# Altium PCB PCB1.PcbDoc
Units mm, origin at the board's own origin, x right, y up, seen from the top; angles counter-clockwise.
Board outline 100 x 54 mm, 2 copper layers (Top Layer, Bottom Layer); 27 components, 13 nets, 80 pads, 0 vias.
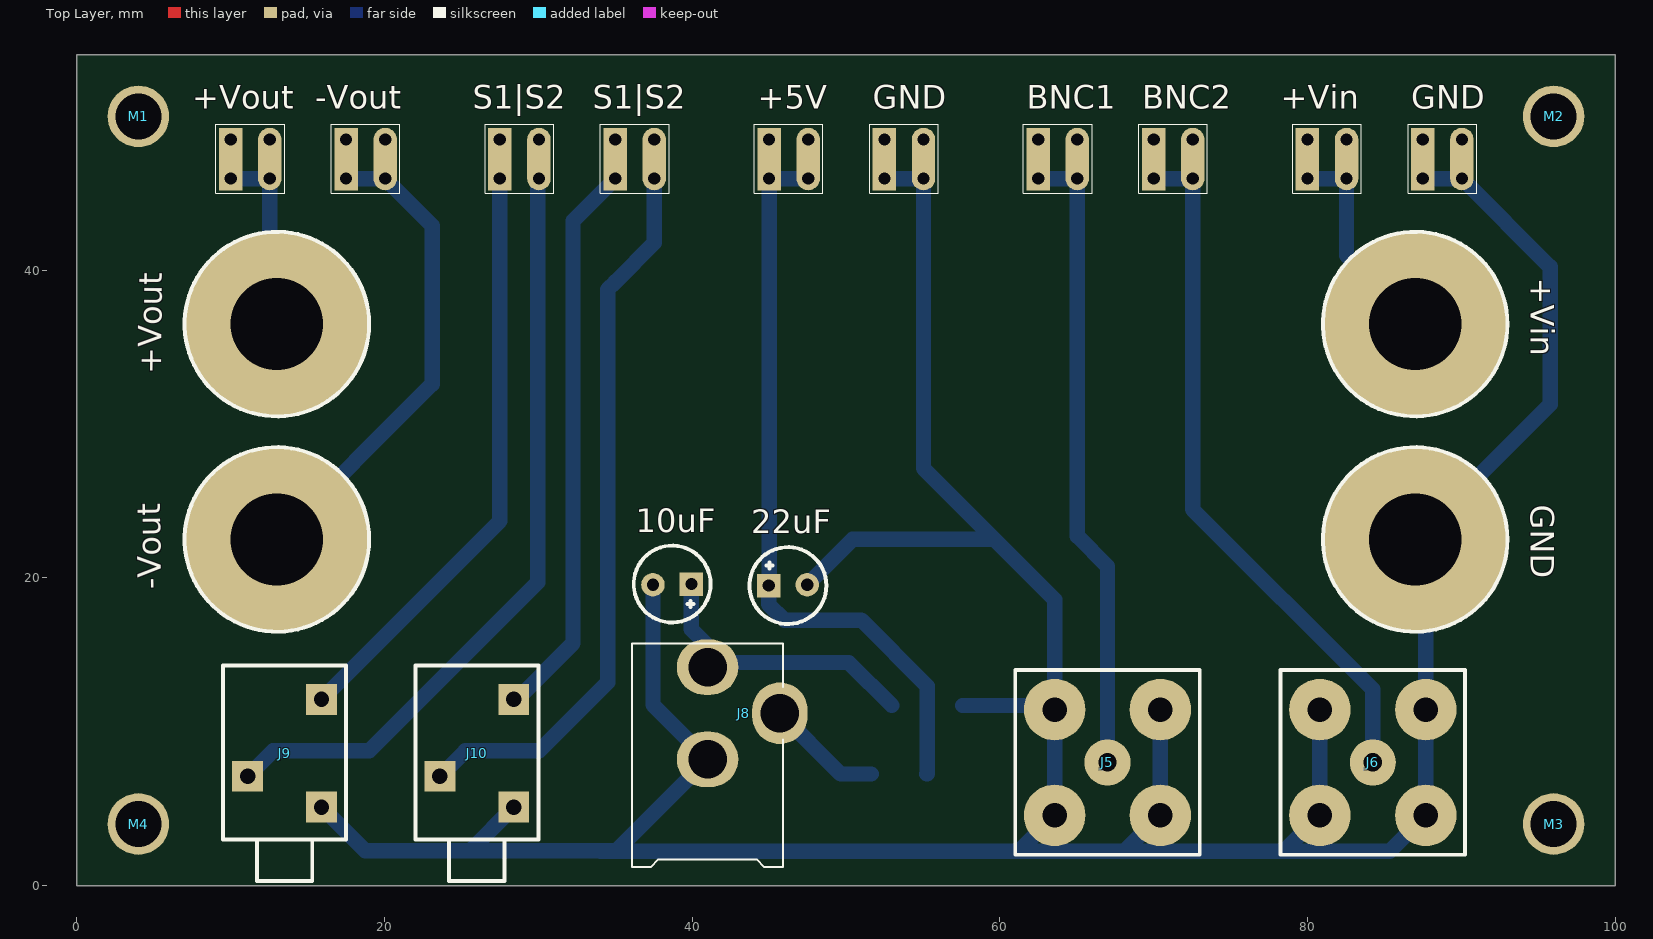
[diagram p0: Top Layer view]
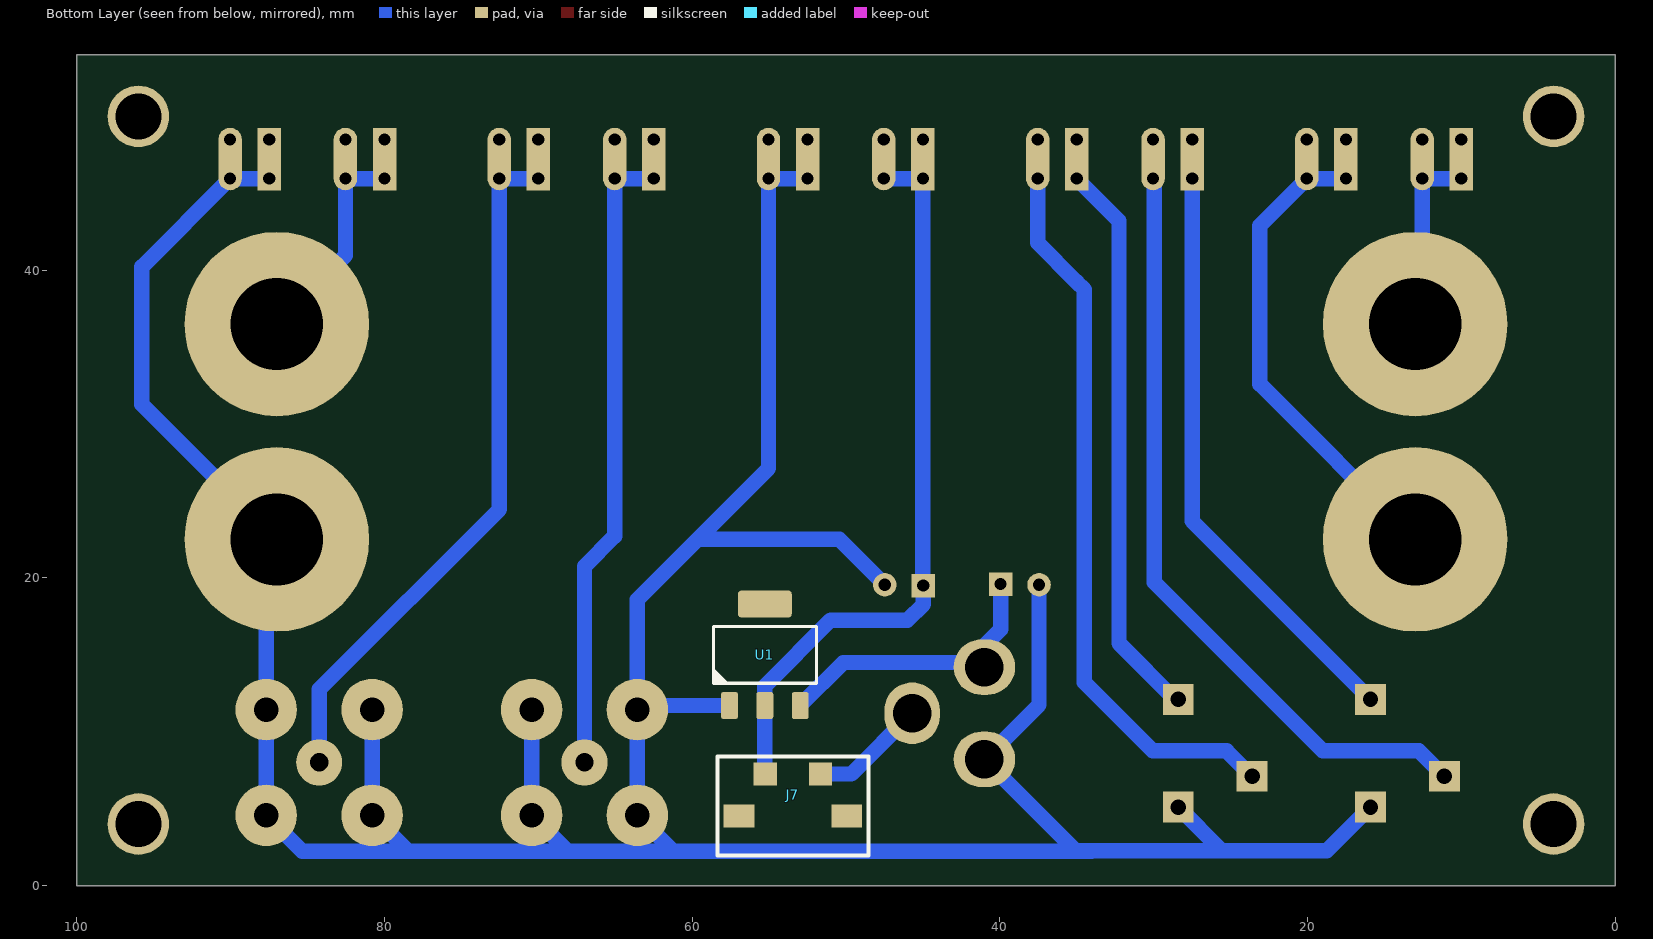
[diagram p1: Bottom Layer view, seen from below]

## Layer stack, top to bottom
Top Solder: solder mask 0.0102, Solder Resist, Dk 3.5
Top Layer: signal copper 0.0356
Dielectric 1: dielectric 0.32, FR-4, Dk 4.8
Bottom Layer: signal copper 0.0356
Bottom Solder: solder mask 0.0102, Solder Resist, Dk 3.5

## Board outline
0,0 100,0 100,54 0,54

## Design rules (kind name [scope] priority, off if disabled: settings)
Clearance [All] p1: gap=0.8
PolygonConnect [All] p1: connectstyle=Relief reliefconductorwidth=0.254 reliefentries=4 polygonreliefangle="90 Angle" airgapwidth=0.254
RoutingVias [All] p1: holewidth=0.711 width=1.27 viastyle="Through Hole" minholewidth=0.711 minwidth=1.27 maxholewidth=0.711 maxwidth=1.27
SolderMaskExpansion [All] p1: expansion=0.102
Width [All] p1: maxlimit=3 minlimit=0.35 preferedwidth=1
30 further rules are at their usual default settings.

## Classes and differential pairs
component class Sheet1: 10uF 22uF +5V +Vin +Vout -Vout BNC1 BNC2 GND J5 J6 J7 J8 J9 J10 M1 M2 M3 M4 S1 U1

## Components (designator, comment, footprint, x,y, rotation, side; value= is the part's Value field where it differs from the comment)
10uF "10uF" Capacitor_E 38.7,19.6 r180 top (schematic designator C1)
22uF "22uF" Capacitor_E 46.225,19.5 r0 top (schematic designator C2)
+5V "Header" HDR1X2 45,48.5 r0 top (schematic designator H6)
+Vin "Header" HDR1X2 80,48.5 r0 top (schematic designator H10)
+Vin "BANANA" Banana 87,36.5 r0 top (schematic designator J2)
+Vout "Header" HDR1X2 10,48.5 r0 top (schematic designator H1)
+Vout "BANANA" Banana 13,36.5 r0 top (schematic designator J1)
-Vout "Header" HDR1X2 17.5,48.5 r0 top (schematic designator H2)
-Vout "BANANA" Banana 13,22.5 r0 top (schematic designator J3)
BNC1 "Header" HDR1X2 62.5,48.5 r0 top (schematic designator H7)
BNC2 "Header" HDR1X2 70,48.5 r0 top (schematic designator H8)
GND "Header" HDR1X2 52.5,48.5 r0 top (schematic designator H5)
GND "Header" HDR1X2 87.5,48.5 r0 top (schematic designator H9)
GND "BANANA" Banana 87,22.5 r0 top (schematic designator J4)
J5 "BNC Fem. 50R" CONN_BNC 67,8 r0 top
J6 "BNC Fem. 50R" CONN_BNC 84.25,8 r0 top
J7 "USB Micro Type B (recommended if hand soldering)" USB_MICRO-B_v2 54.75,7.5 r180 bottom
J8 "CONN_PWR_JACK_2.1x5.5mm" CONN_PWR_JACK_2.1x5.5mm 41,0.5 r180 top
J9 "Audio Jack" CONN_AUDIO 13.5,3 r90 top
J10 "Audio Jack" CONN_AUDIO 26,3 r90 top
M1 "Suport" Support 4,50 r0 top
M2 "Suport" Support 96,50 r0 top
M3 "Suport" Support 96,4 r0 top
M4 "Suport" Support 4,4 r0 top
S1|S2 "Header" HDR1X2 27.5,48.5 r0 top (schematic designator H3)
S1|S2 "Header" HDR1X2 35,48.5 r0 top (schematic designator H4)
U1 "AMS1117" SOT223 55.275,15 r90 bottom

## Footprints (in the part's own frame and the unit in brackets; to place one, negate y for a bottom-side part, rotate by r counter-clockwise, add the part's x,y. Pads: shape width x height; smd on the part's side, far side on the other; paste and mask are expansions set on the pad)
Banana [mm] "Female"
  round 12 hole 6: 1(0,0)
  silkscreen extent -6,-6 6,6
Capacitor_E [mm]
  rect 1.524x1.524 hole 0.8: 1(-1.25,0)
  round 1.524 hole 0.8: 2(1.25,0.05)
  silkscreen extent -2.5,-2.5 2.5,2.5, body extent -2.49,-2.45 2.49,2.55, height 1.5
CONN_AUDIO [mm]
  rect 2x2 hole 1: 1(2.1,-2.4) 2(4.1,2.4) 3(9.1,-2.4)
  silkscreen extent -2.7,-4 11.3,4
CONN_BNC [mm]
  round 3 hole 1.2: 1(0,0)
  round 4 hole 1.6: 2(-3.44,-3.44) 2(-3.44,3.44) 2(3.44,-3.44) 2(3.44,3.44)
  silkscreen extent -6,-6 6,6
CONN_PWR_JACK_2.1x5.5mm [mm] "Power Connector, 2.1mm ID, 5.5mm OD"
  oval 4x3.6 hole 2.5: 1(0,-13.7) 2(0,-7.7)
  oval 3.6x4 hole 2.5: 3(-4.7,-10.7)
  silkscreen extent -4.9,-15.22 4.92,-0.7, body extent -4.9,-14.1 4.5,0, height 11
HDR1X2 [mil] "Connector; Header; 2 Position"
  rect 60x160 hole 31.5 copper offset 0,50: 1(0,-100)
  rect 60x160 hole 31.5 copper offset 0,-50: 1(0,0)
  oval 60x160 hole 31.5 copper offset 0,50: 2(100,-100)
  oval 60x160 hole 31.5 copper offset 0,-50: 2(100,0)
  silkscreen extent -38,-138 138,39
SOT223 [mm] "SOT223 /SC-73"
  round 1 on Mech15: 0(0,0)
  rrect25% 1.75x1.1 smd: 1(-3.3,2.3) 2(-3.3,0) 3(-3.3,-2.3)
  rrect25% 1.75x3.5 smd: 4(3.3,0)
  silkscreen extent -1.85,-3.35 1.85,3.35, body extent -3.65,-3.35 3.65,3.35, height 1.8
Support [mm]
  round 4 hole 3: 0(0,0)
USB_MICRO-B_v2 [mm]
  rect 1.5x1.5 smd: 1(-0.5,-0.25) 5(3.1,-0.25)
  rect 2x1.5 smd: SH(-2.2,-2.975) SH(4.8,-2.975)
  silkscreen extent -3.6,-5.54 6.2,0.9

## Part data
10uF 22uF: library part CAPE
+5V +Vin +Vout -Vout BNC1 BNC2 GND GND S1|S2 S1|S2: library part Header2P, "Header, 2-pin"
+Vin +Vout -Vout GND: "Female Connector"
J5 J6: library part CONN_BNC_FEM_50R, "Connector BNC 50 Ohm right-angle PCB mounted"
J7: library part USB_Micro_TypeB_FCI, "Connector SMD-THD USB Micro Type B middle mount"
J9 J10: library part CONN_MINIPHONEJACK, "Stereo phone jack mini"
U1: "Voltage Regulator"

## Nets (pads, with @x,y where several pads share a name; then routed paths per layer and width w, separated by ;. In a path a pad name is that pad's centre, name@x,y a point inside that pad or via, vN(x,y) a via of type N, cw(c..) or ccw(c..) an arc to the next point about the centre after c; other vN are vias at no path point)
+5V: 22uF.1 +5V.1 +5V.2 J7.1 U1.2 | length 48.5
  Bottom Layer w1: +5V.2@47.54,45.96 45,45.96 45,19.525 22uF.1 44.975,18.275 46,17.25 51,17.25 55.275,12.975 U1.2 55.275,7.275 J7.1
+VIN: +Vin.1 +Vin.2 | length 13.8
  Bottom Layer w1: +Vin.1@80,45.96 82.54,45.96 82.54,40.96 +Vin.1@87,36.5
BNC_1: BNC1.1 BNC1.2 J5.1 | length 41.3
  Bottom Layer w1: BNC1.1@62.5,45.96 65.04,45.96 65.04,22.71 67,20.75 J5.1
BNC_2: BNC2.1 BNC2.2 J6.1 | length 45.4
  Bottom Layer w1: BNC2.1@70,45.96 72.54,45.96 72.54,24.46 84.25,12.75 J6.1
GND: 10uF.2 22uF.2 GND.1 GND.2 J5.2 J6.2 J8.2 J9.1 J10.1 U1.1 | length 240.4
  Bottom Layer w1: J9.1 18.75,2.25 25.55,2.25 ; J10.1 25.55,2.25 ; 34.03,2.23 61.25,2.23 ; 10uF.2 37.45,11.75 J8.2 ; J8.2@40.5,7.7 35.05,2.25 25.55,2.25 ; 22uF.2 50.425,22.5 59.655,22.5 ; GND.1@52.5,45.96 55.04,45.96 55.04,27.115 59.655,22.5 ; U1.1 63.3,11.7 J5.2@63.56,11.44 ; J5.2@70.44,11.44 70.44,4.56 68.11,2.23 ; J6.2@80.81,11.44 80.81,4.56 78.48,2.23 ; GND.1@87.5,45.96 90.04,45.96 95.775,40.225 95.775,31.275 87,22.5 87.69,21.81 87.69,11.44 87.69,4.56 85.36,2.23 78.48,2.23 ; 59.655,22.5 63.56,18.595 J5.2@63.56,11.44 ; 61.25,2.23 63.56,4.54 63.56,4.56 J5.2@63.56,11.44 ; 61.25,2.23 68.11,2.23 ; 68.11,2.23 78.48,2.23
NetJ7_5: J7.5 J8.3 | length 7.6
  Bottom Layer w1: J8.3 49.65,7.25 J7.5
POWERDC: 10uF.1 J8.1 U1.3 | length 19
  Bottom Layer w1: 10uF.1 39.95,16.65 J8.1@42.175,14.425 ; J8.1@39.968,14.232 J8.1@40,14.2 ; J8.1@41.3,14.5 50.175,14.5 U1.3
S11: J9.3 S1|S2.1@27.5,45.96 S1|S2.1@27.5,48.5 | length 38.7
  Bottom Layer w1: J9.3 27.5,23.7 S1|S2.1@27.5,45.96
S12: J9.2 S1|S2.2@30.04,45.96 S1|S2.2@30.04,48.5 | length 50.4
  Bottom Layer w1: J9.2 12.75,8.75 19,8.75 29.95,19.7 29.95,45.87 S1|S2.2@30.04,45.96
S21: J10.3 S1|S2.1@35,45.96 S1|S2.1@35,48.5 | length 36.7
  Bottom Layer w1: J10.3@28.5,12 32.25,15.75 32.25,43.21 S1|S2.1@35,45.96
S22: J10.2 S1|S2.2@37.54,45.96 S1|S2.2@37.54,48.5 | length 47.4
  Bottom Layer w1: J10.2 25.25,8.75 30.053,8.75 34.5,13.197 34.5,38.75 35,39.25 37.54,41.79 S1|S2.2@37.54,45.96
VOUT+: +Vout.1 +Vout.2 | length 12.2
  Bottom Layer w1: +Vout.1@10,45.96 12.54,45.96 12.54,36.96 +Vout.1@13,36.5
VOUT-: -Vout.1 -Vout.2 | length 31.5
  Bottom Layer w1: -Vout.1@13,22.5 23.1,32.6 23.1,42.9 20.04,45.96 -Vout.1@17.5,45.96
pads on no net: J7.SH M1.0 M2.0 M3.0 M4.0 U1.0 U1.4

## Keep-outs
Mechanical 1:
  the board outline again, w0.5

## Silkscreen, mask and mechanical layers (free items; w line width, h text height)
Mechanical 1:
  the board outline again, w0.5